# Altium PCB M8030.PcbDoc
Units mm, origin at the board's own origin, x right, y up, seen from the top; angles counter-clockwise.
Board outline 35.05 x 35.05 mm, 4 copper layers (Top Layer, GND, Signal, Bottom Layer), stack 0.778 mm thick; 49 components, 40 nets, 167 pads, 262 vias.
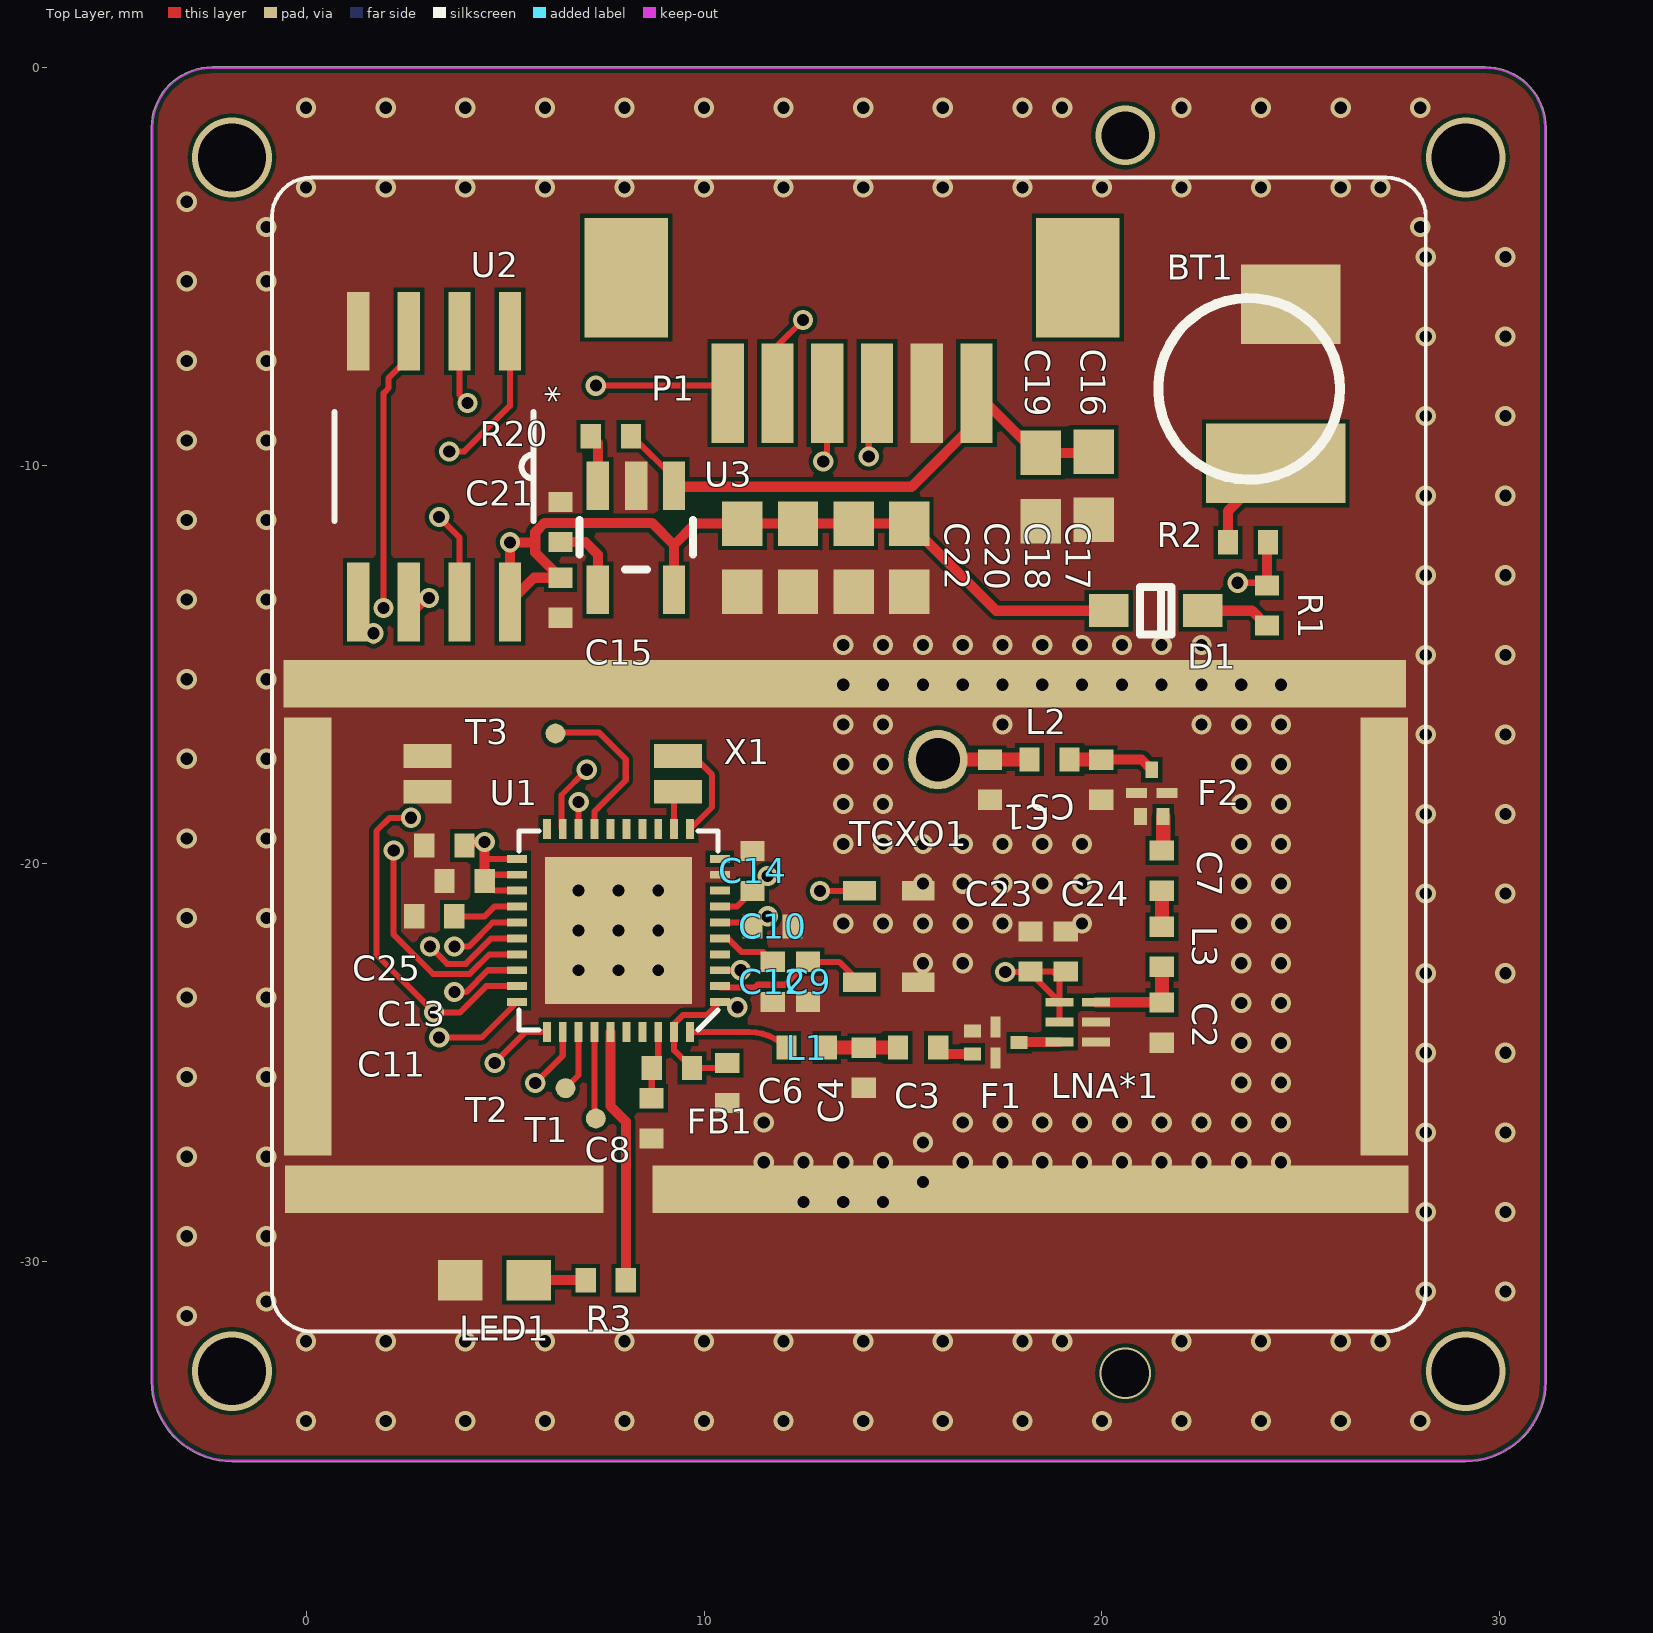
[diagram p0: Top Layer view]
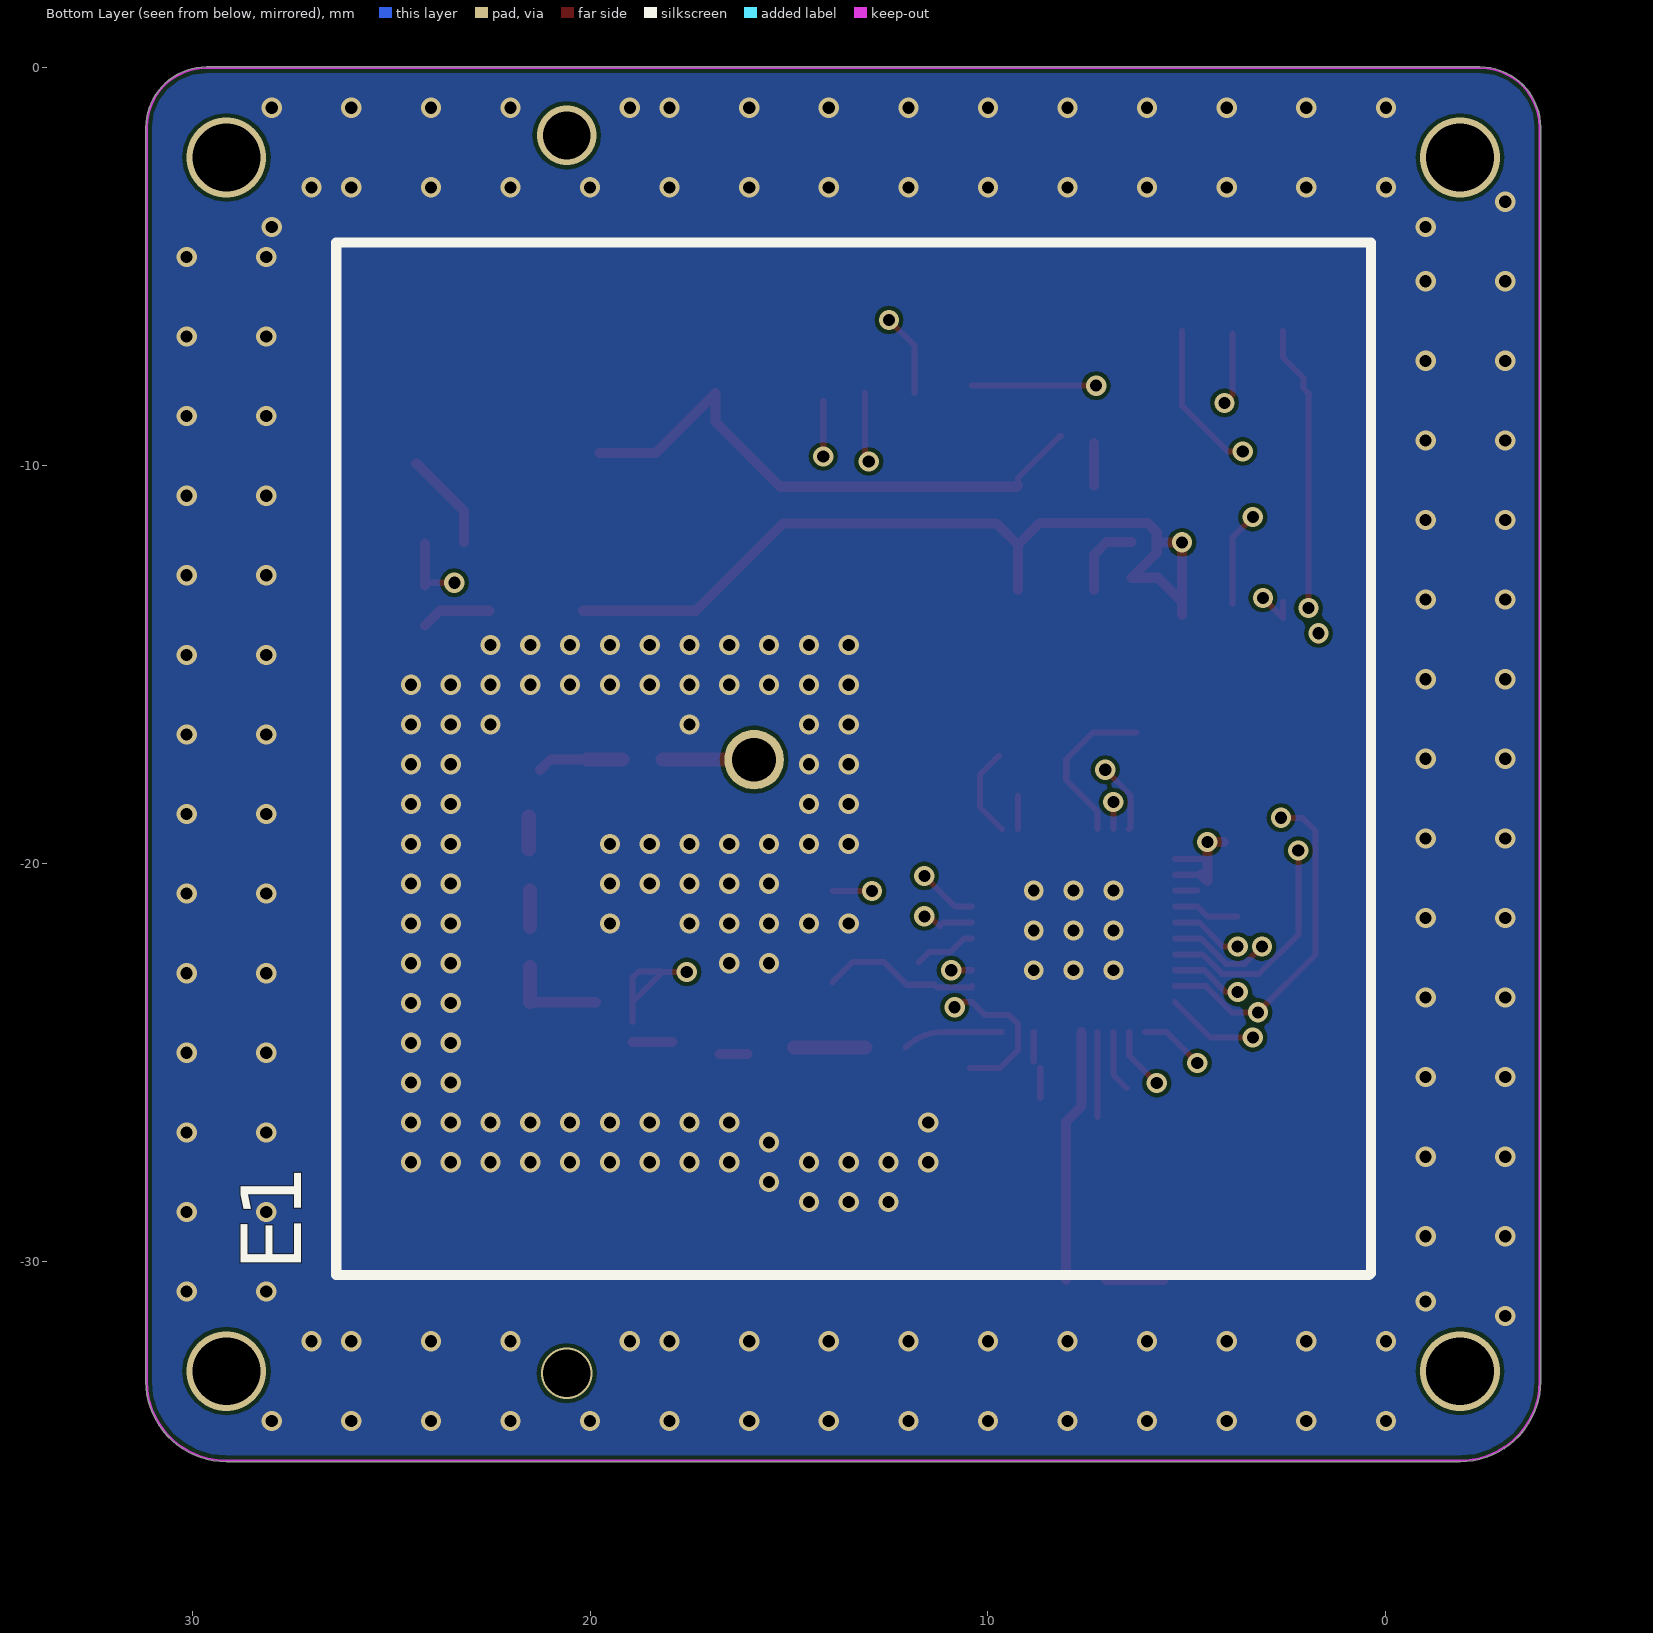
[diagram p1: Bottom Layer view, seen from below]
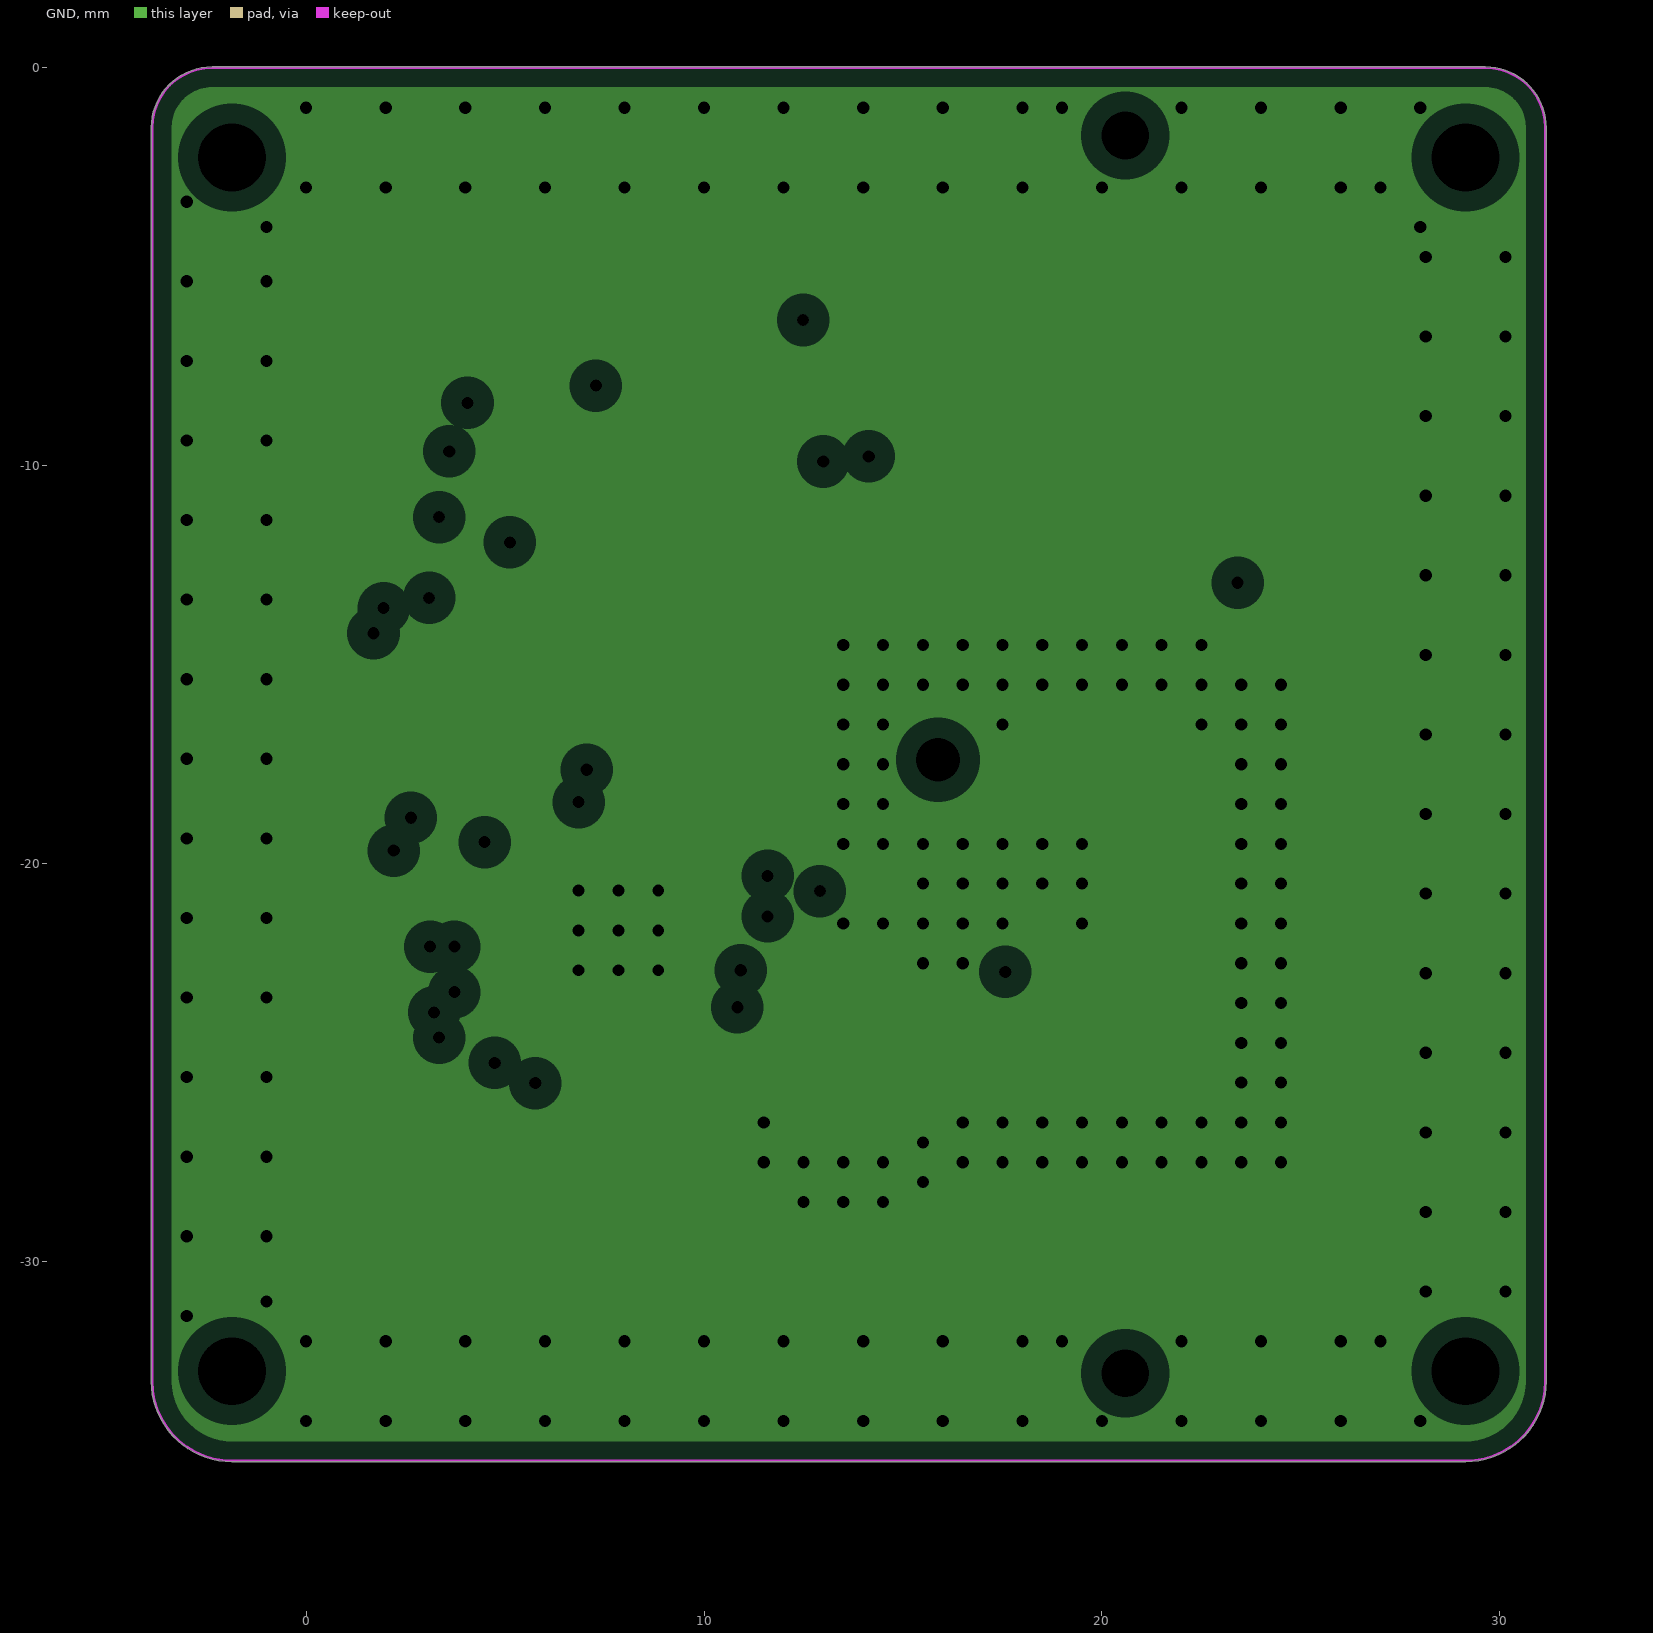
[diagram p2: GND, clearances drawn from the general rule]
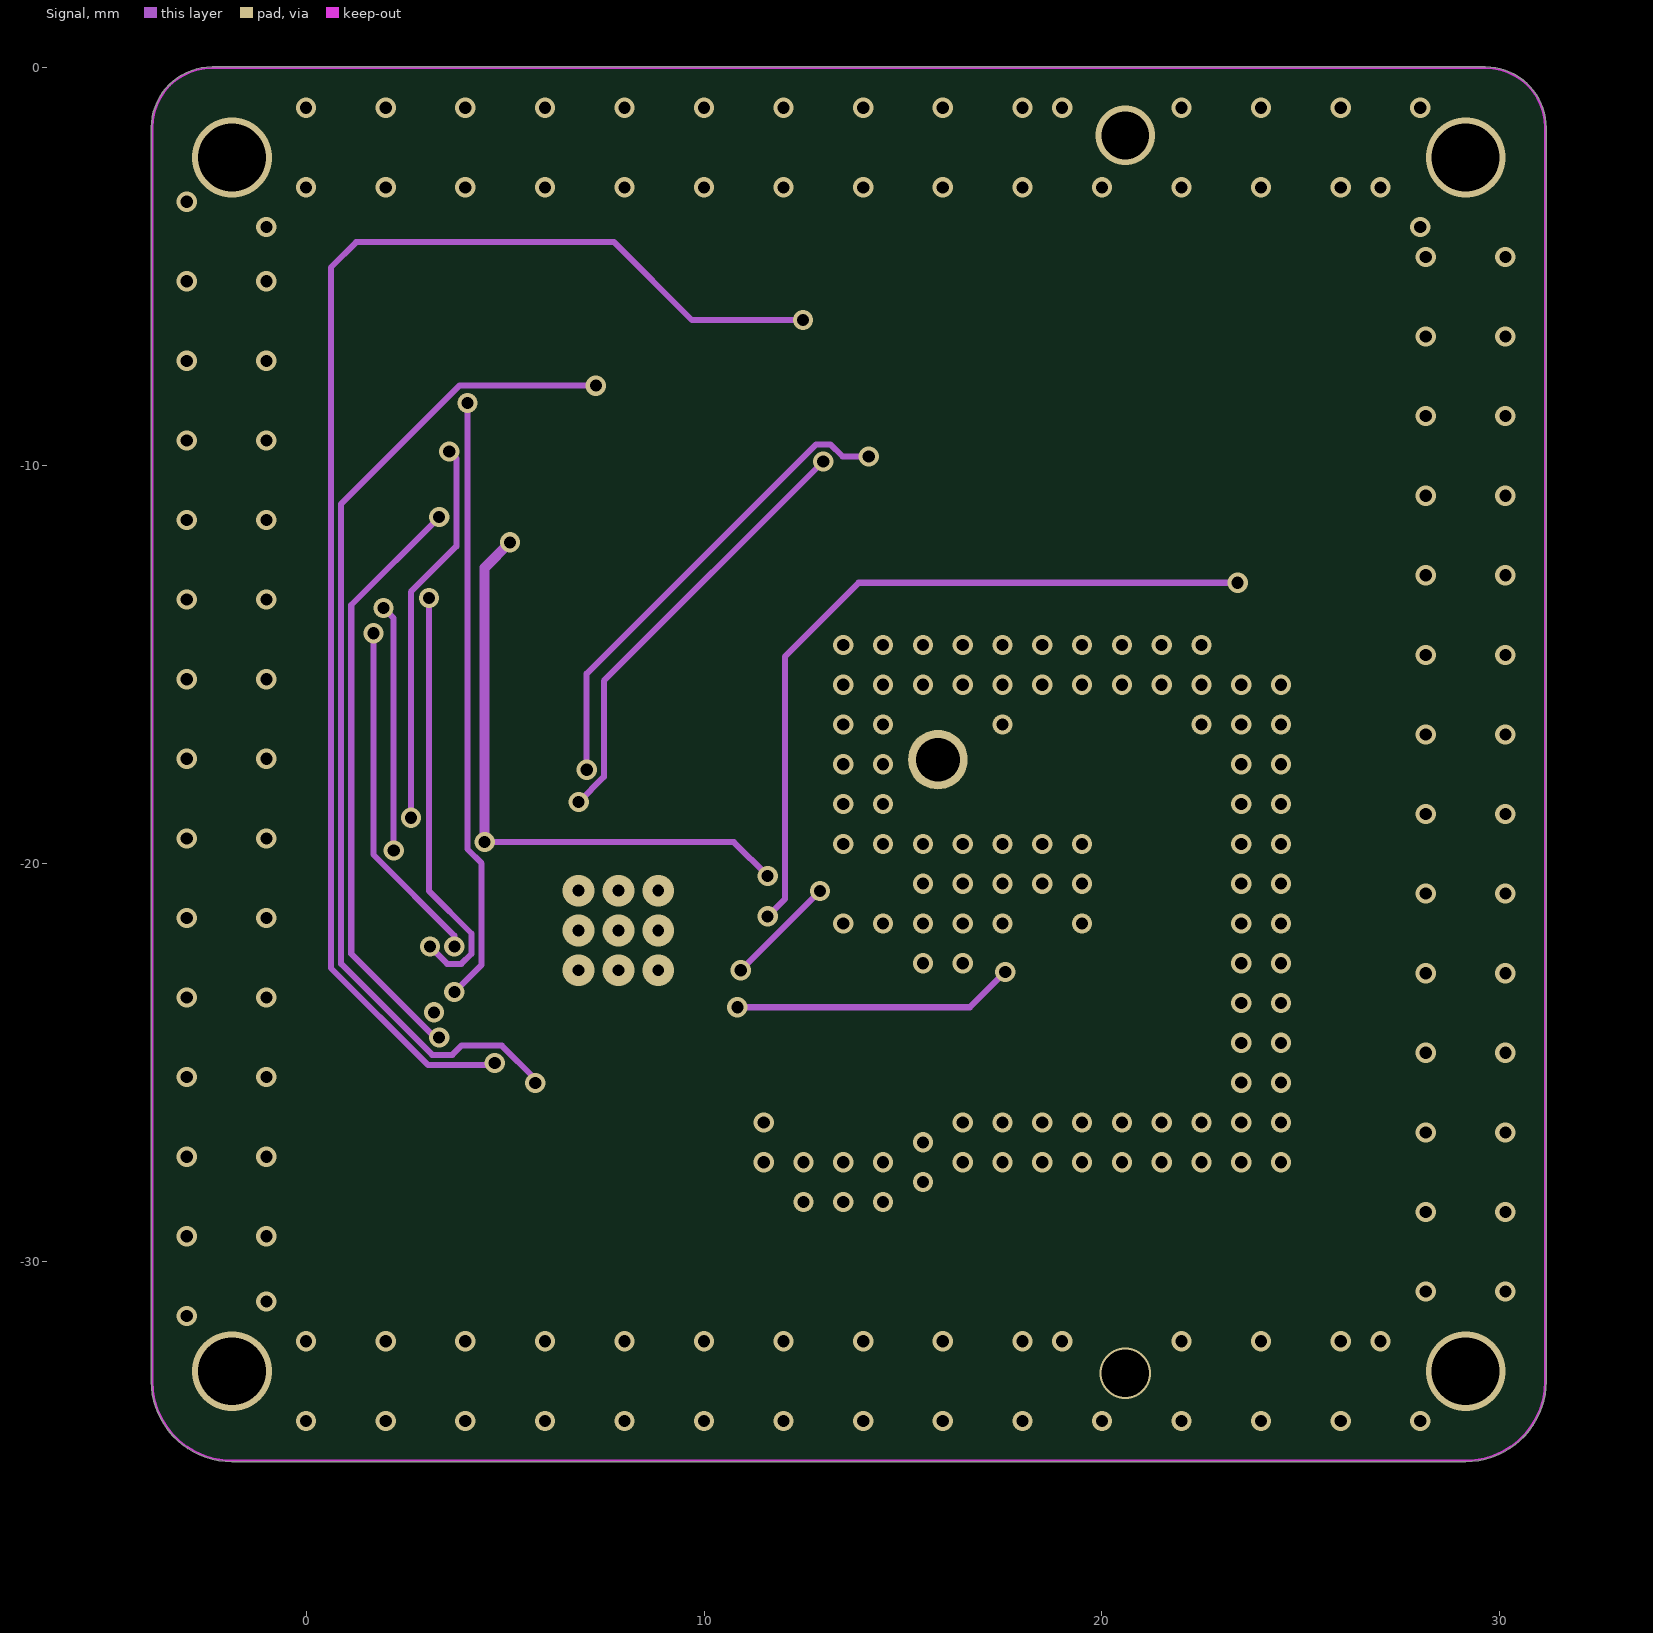
[diagram p3: Signal]

## Layer stack, top to bottom
Top Solder: solder mask 0.0102, Solder Resist, Dk 3.5
Top Layer: signal copper 0.0356
Dielectric 1: core 0.254, FR-4, Dk 4.2
GND: plane copper 0.036, net GND
Dielectric 3: prepreg 0.127, Dk 4.2
Signal: signal copper 0.036
Dielectric 2: core 0.254, Dk 4.2
Bottom Layer: signal copper 0.0356
Bottom Solder: solder mask 0.0102, Solder Resist, Dk 3.5

## Board outline
-3.888,-33 -3.888,-1.5 cw(c-3.863,-1.5) -3.888,-1.5 cw(c-2.363,-1.5) -2.363,0.025 29.637,0.025 cw(c29.637,-1.5) 31.162,-1.5 cw(c31.137,-1.5) 31.162,-1.5 31.162,-33 cw(c29.137,-33) 29.137,-35.025 -1.863,-35.025 cw(c-1.863,-33)

## Design rules (kind name [scope] priority, off if disabled: settings)
Clearance [All] p1: gap=0.102
MinimumSolderMaskSliver [All] p1 off: minsoldermaskwidth=0.254
PlaneClearance [All] p1: clearance=0.508
PlaneConnect [All] p1: planeconnectstyle=Direct reliefexpansion=0.508 reliefentries=4 reliefconductorwidth=0.254 reliefairgap=0.254
PolygonConnect [All] p1: connectstyle=Direct reliefconductorwidth=0.254 reliefentries=4 polygonreliefangle="90 Angle" airgapwidth=0.254
RoomDefinition M8030 [InComponentClass('M8030')] p1 off: confinementstyle=ConfineIn formatcopy=TRUE lockcomponents=FALSE outline 131.331,-44.746 137.427,-44.746 137.427,-36.11 131.331,-36.11
RoutingVias [All] p1: holewidth=0.305 width=0.508 viastyle="Through Hole" minholewidth=0.305 minwidth=0.508 maxholewidth=0.711 maxwidth=1.27
SilkToSilkClearance [All] p1 off: silktosilkclearance=0.254
SilkToSolderMaskClearance [IsPad] p1 off: minsilkscreentomaskgap=0.254 clearancetoexposedcopper=TRUE
SolderMaskExpansion [All] p1: expansion=0.102
UnpouredPolygon [All] p1: allowunpoured=FALSE
Width [All] p1: maxlimit=0.508 minlimit=0.102 preferedwidth=0.152
24 further rules are at their usual default settings.

## Components (designator, comment, footprint, x,y, rotation, side; value= is the part's Value field where it differs from the comment)
BT1 "Battery" XH414H-IV01E 23.697,-8.065 r180 top
C1 "NC" 0402 17.187,-17.891 r90 top
C2 "NC" 0402 21.505,-23.987 r270 top
C3 "47pF" 0402 15.376,-24.618 r0 top
C4 "2.7pF" 0402 14.012,-25.13 r90 top
C5 "NC" 0402 19.981,-17.891 r90 top
C6 "1uF" 0402 10.583,-25.511 r90 top
C7 "470pF" 0402 21.505,-20.177 r90 top
C8 "1uF" 0402 8.678,-26.4 r90 top
C9 "1uF" 0402 12.615,-22.971 r90 top
C10 "1uF" 0402 11.726,-21.574 r180 top
C11 "1uF" 0402 3.217,-21.32 r0 top
C12 "2.2uF" 0402 11.726,-22.971 r90 top
C13 "4.7uF" 0402 3.979,-20.431 r0 top
C14 "1uF" 0402 11.218,-20.177 r270 top
C15 "1uF" 0402 6.392,-13.319 r90 top
C16 "4.7uF" 0603 19.796,-10.496 r270 top
C17 "4.7uF" 0603 15.155,-12.303 r270 top
C18 "4.7uF" 0603 13.758,-12.303 r270 top
C19 "0.1uF" 0603 18.457,-10.525 r270 top
C20 "4.7uF" 0603 12.361,-12.303 r270 top
C21 "0.1uf" 0402 6.392,-11.414 r90 top
C22 "0.1uF" 0603 10.964,-12.303 r270 top
C23 "33nF" 0402 18.203,-22.209 r90 top
C24 "47pF" 0402 19.092,-22.209 r90 top
C25 "4.7uF" 0402 3.471,-19.542 r0 top
D1 "Diode" LC-SOD-323 21.353,-13.64 r180 top
E1 "Antenna" "passive25x25 - 3D" 13.377,-17.383 r90 bottom
F1 "SAW-SAFEB" SAFEB1G57KE0 17.916,-24.491 r0 top
F2 "SAW-SAFEB" SAFEB1G57KE0 21.251,-17.637 r90 top
FB1 "BLM15HD102SN1" 0402 9.186,-25.13 r0 top
L1 "6.8nH" 0402 12.582,-24.618 r180 top
L2 "0R" 0402 18.678,-17.379 r0 top
L3 "6.8nH" 0402 21.505,-22.082 r270 top
LED1 "LED0" 0603 4.741,-30.464 r180 top
LNA*1 "MAX2659" MAX2659 19.854,-23.479 r180 top
P1 "Usart Interface" WFRSM125 13.094,-8.17 r180 top
R1 "" 0402 24.147,-13.513 r90 top
R2 "" 0402 23.664,-11.922 r0 top
R3 "" 0402 7.535,-30.464 r180 top
R20 "10k" 0402 7.662,-9.255 r180 top
T1 "TestPad" "TestPad - 0.5mm" 7.281,-26.4 r270 top
T2 "TestPad" "TestPad - 0.5mm" 6.519,-25.638 r0 top
T3 "TestPad" "TestPad - 0.5mm" 6.265,-16.726 r0 top
TCXO1 "26M 0.5ppm" 2520_TCXO 14.647,-21.828 r90 top
U1 "UBX-M8030-KT_1" UBX-M8030-KT 7.849,-21.676 r180 top
U2 "SQI_FLash" SO8-208mil 3.217,-10.017 r270 top
U3 "RT9193-33GB" SOT23-5 8.297,-11.795 r180 top
X1 "32.768k, 6-12pF" MC-146 6.198,-17.739 r180 top

## Footprints (in the part's own frame and the unit in brackets; to place one, negate y for a bottom-side part, rotate by r counter-clockwise, add the part's x,y. Pads: shape width x height; smd on the part's side, far side on the other; paste and mask are expansions set on the pad)
0402 [mil] "0402-RES"
  rect 20x24 smd: 1(-19.69,0) 2(20,0)
0603 [mil] "0603-RES"
  rect 44x40 smd: 1(-33.46,0) 2(34,0)
2520_TCXO [mm]
  rect 0.5x0.825 smd: 1(-1.15,-0.737) 2(1.15,-0.737) 3(1.15,0.737) 4(-1.15,0.737)
LC-SOD-323 [mm]
  rect 1x0.83 smd: 1(1.18,0) 2(-1.18,0)
  silkscreen extent -0.4,-0.6 0.4,0.6, body extent -1.35,-0.62 1.35,0.63, height 1.1
MAX2659 [mm]
  rect 0.7x0.22 smd: 1(0,1) 2(0,0.5) 3(0,0) 4(0.92,0) 5(0.92,0.5) 6(0.92,1)
  body extent -0.03,-0.23 0.97,1.22, height 0.72
MC-146 [mm]
  rect 1.2x0.6 smd: 1(-3.15,0.45) 2(3.15,0.45) 3(-3.15,-0.45) 4(3.15,-0.45)
"passive25x25 - 3D" [mm]
  round 1.5 hole 1.1: 1(0,2.5)
  silkscreen extent -12.95,-13 13,13, body extent -12.42,-12.55 12.68,12.55, height 2.5
SAFEB1G57KE0 [mm]
  rect 0.425x0.325 smd: 1(0,0) 3(-1.175,-0.288) 4(-1.175,0.288)
  rect 0.25x0.525 smd: 2(-0.587,-0.387) 5(-0.587,0.387)
  body extent -1.27,-0.56 0.08,0.53, height 0.6
SO8-208mil [mil]
  rect 78x22 smd: 1(-133.86,75) 2(-133.86,25) 3(-133.86,-25) 4(-133.86,-75) 5(133.86,-75) 6(133.86,-25) 7(133.86,25) 8(133.86,75)
  silkscreen extent -54,-99 54,99, body extent -118,-96 118,96, height 64
SOT23-5 [mil] "SOT23-5"
  rect 22x48 smd: 1(-37.4,-51.19) 2(0,-51.19) 3(38,-51.19) 4(38,52) 5(-37.4,52)
  silkscreen extent -56,-17 56,32
"TestPad - 0.5mm" [mm]
  round 0.5 smd: 1(0,0)
UBX-M8030-KT [mm]
  rect 3.7x3.7 smd: 0(0,0)
  rect 0.5x0.2 smd: 1(-2.55,1.8) 2(-2.55,1.4) 3(-2.55,1) 4(-2.55,0.6) 5(-2.55,0.2) 6(-2.55,-0.2) 7(-2.55,-0.6) 8(-2.55,-1) 9(-2.55,-1.4) 10(-2.55,-1.8) 21(2.55,-1.8) 22(2.55,-1.4) 23(2.55,-1) 24(2.55,-0.6) 25(2.55,-0.2) 26(2.55,0.2) 27(2.55,0.6) 28(2.55,1) 29(2.55,1.4) 30(2.55,1.8)
  rect 0.2x0.5 smd: 11(-1.8,-2.55) 12(-1.4,-2.55) 13(-1,-2.55) 14(-0.6,-2.55) 15(-0.2,-2.55) 16(0.2,-2.55) 17(0.6,-2.55) 18(1,-2.55) 19(1.4,-2.55) 20(1.8,-2.55) 31(1.8,2.55) 32(1.4,2.55) 33(1,2.55) 34(0.6,2.55) 35(0.2,2.55) 36(-0.2,2.55) 37(-0.6,2.55) 38(-1,2.55) 39(-1.4,2.55) 40(-1.8,2.55)
  silkscreen extent -2.5,-2.5 2.5,2.5, body extent -2.5,-2.5 2.5,2.5, height 1
WFRSM125 [mm]
  rect 0.81x2.5 smd: 1(-3.75,0) 2(-2.5,0) 3(-1.25,0) 4(0,0) 5(1.25,0) 6(2.5,0)
  rect 2.1x3 smd: shell(-6.3,-2.9) shell(5.05,-2.9)
  body extent -6.79,-3.82 5.46,0.38, height 3.4
XH414H-IV01E [mm]
  rect 3.5x2 smd: 1(-0.671,1.873)
  rect 2.5x2 smd: 2(-1.052,-2.127)
  silkscreen extent -2.28,-2.28 2.28,2.28, body extent -2.42,-2.4 2.36,2.4, height 2

## Part data
BT1: "Multicell Battery"
C1 C2 C3 C4 C5 C6 C7 C8 C9 C10 C11 C12 C13 C14 C15 C23 C24 C25: library part Cap, "Capacitor"
C16 C17 C18 C19 C20 C21 C22: library part CAP0402-CAP, "电容"
D1: "Default Diode"
E1: "Generic Antenna"
FB1 R1 R2 R3: library part Res2, "Resistor"
L1 L2 L3: library part Inductor, "Inductor"
LED1: "Typical INFRARED GaAs LED"
P1: library part "Header 6", "Header, 6-Pin"
R20: library part RESISTOR0402-RES, "电阻"
TCXO1: library part 7L26002009(2520TCXO)
U3: library part V_REG_LDOSMD, "<b>Voltage Regulator LDO</b> / Standard 150mA LDO voltage regulator in SOT-23 layout. Micrel part MIC5205. BP (by-pass) pin is used to lower output noise with 470pF cap."
X1: library part OSCILLATOR-3.2X2.5, "Crystal Oscillator in 3.2x2.5 SMD"

## Free pads (board coordinates)
  rect 19x1.2 smd: 0(18.203,-28.178)
  rect 28.2x1.2 smd: 1(13.537,-15.475)
  rect 1.2x11 smd: 2(27.093,-21.828) 3(0.042,-21.828)
  rect 8x1.2 smd: 4(3.471,-28.178)

## Via types
v1: diameter 0.508, hole 0.305, Top Layer to Bottom Layer, tented both sides, 247 vias
v2: diameter 0.5/0.8/0.5 (per signal layer), hole 0.3, Top Layer to Bottom Layer, tented both sides, 9 vias
v3: diameter 2, hole 1.7, Top Layer to Bottom Layer, 4 vias
v4: diameter 1.3, hole 1.2, Top Layer to Bottom Layer, 1 vias
v5: diameter 1.5, hole 1.2, Top Layer to Bottom Layer, 1 vias

## Nets (pads, with @x,y where several pads share a name; then routed paths per layer and width w, separated by ;. In a path a pad name is that pad's centre, name@x,y a point inside that pad or via, vN(x,y) a via of type N, cw(c..) or ccw(c..) an arc to the next point about the centre after c; other vN are vias at no path point)
5V: C16.1 C19.1 P1.1 R20.1 U3.1 | length 14.3
  Top Layer w0.152: R20.1 8.198,-9.255 9.247,-10.304 U3.1
  Top Layer w0.254: U3.1 9.277,-10.525 15.217,-10.525 16.844,-8.898 P1.1 18.349,-9.675 C19.1 C16.1@19.767,-9.675
GND: BT1.2 C1.1 C2.2 C4.1 C5.1 C6.1 C8.1 C9.1 C10.1 C11.1 C12.1 C13.1 C14.1 C15.1 C16.2 C17.2 C18.2 C19.2 C20.2 C21.2 C22.2 C23.2 C24.2 C25.1 F1.2 F1.4 F1.5 F2.2 F2.4 F2.5 LED1.2 LNA*1.1 LNA*1.2 P1.2 pad.0 pad.1 pad.2 pad.3 pad.4 TCXO1.1 TCXO1.2 U1.0 U1.9 U2.4 U3.2 X1.2 X1.4
  other v1: 0,-34 2,-34 4,-34 6,-34 8,-34 10,-34 12,-34 14,-34 16,-34 18,-34 20,-34 22,-34 24,-34 26,-34 28,-34 0,-32 2,-32 4,-32 6,-32 8,-32 10,-32 12,-32 14,-32 16,-32 18,-32 19,-32 22,-32 24,-32 26,-32 27,-32 -3,-31.361 -1,-31 28.137,-30.75 30.137,-30.75 -3,-29.361 -1,-29.361 28.137,-28.75 30.137,-28.75 12.5,-28.5 13.5,-28.5 14.5,-28.5 15.5,-28 11.5,-27.5 12.5,-27.5 13.5,-27.5 14.5,-27.5 16.5,-27.5 17.5,-27.5 18.5,-27.5 19.5,-27.5 20.5,-27.5 21.5,-27.5 22.5,-27.5 23.5,-27.5 24.5,-27.5 -3,-27.361 -1,-27.361 15.5,-27 28.137,-26.75 30.137,-26.75 11.5,-26.5 16.5,-26.5 17.5,-26.5 18.5,-26.5 19.5,-26.5 20.5,-26.5 21.5,-26.5 22.5,-26.5 23.5,-26.5 24.5,-26.5 23.5,-25.5 24.5,-25.5 -3,-25.361 -1,-25.361 28.137,-24.75 30.137,-24.75 23.5,-24.5 24.5,-24.5 23.5,-23.5 24.5,-23.5 -3,-23.361 -1,-23.361 28.137,-22.75 30.137,-22.75 15.5,-22.5 16.5,-22.5 23.5,-22.5 24.5,-22.5 13.5,-21.5 14.5,-21.5 15.5,-21.5 16.5,-21.5 17.5,-21.5 19.5,-21.5 23.5,-21.5 24.5,-21.5 -3,-21.361 -1,-21.361 28.137,-20.75 30.137,-20.75 15.5,-20.5 16.5,-20.5 17.5,-20.5 18.5,-20.5 19.5,-20.5 23.5,-20.5 24.5,-20.5 13.5,-19.5 14.5,-19.5 15.5,-19.5 16.5,-19.5 17.5,-19.5 18.5,-19.5 19.5,-19.5 23.5,-19.5 24.5,-19.5 -3,-19.361 -1,-19.361 28.137,-18.75 30.137,-18.75 13.5,-18.5 14.5,-18.5 23.5,-18.5 24.5,-18.5 13.5,-17.5 14.5,-17.5 23.5,-17.5 24.5,-17.5 -3,-17.361 -1,-17.361 28.137,-16.75 30.137,-16.75 13.5,-16.5 14.5,-16.5 17.5,-16.5 22.5,-16.5 23.5,-16.5 24.5,-16.5 13.5,-15.5 14.5,-15.5 15.5,-15.5 16.5,-15.5 17.5,-15.5 18.5,-15.5 19.5,-15.5 20.5,-15.5 21.5,-15.5 22.5,-15.5 23.5,-15.5 24.5,-15.5 -3,-15.361 -1,-15.361 28.137,-14.75 30.137,-14.75 13.5,-14.5 14.5,-14.5 15.5,-14.5 16.5,-14.5 17.5,-14.5 18.5,-14.5 19.5,-14.5 20.5,-14.5 21.5,-14.5 22.5,-14.5 -3,-13.361 -1,-13.361 28.137,-12.75 30.137,-12.75 -3,-11.361 -1,-11.361 28.137,-10.75 30.137,-10.75 -3,-9.361 -1,-9.361 28.137,-8.75 30.137,-8.75 -3,-7.361 -1,-7.361 28.137,-6.75 30.137,-6.75 -3,-5.361 -1,-5.361 28.137,-4.75 30.137,-4.75 -1,-4 28,-4 -3,-3.361 0,-3 2,-3 4,-3 6,-3 8,-3 10,-3 12,-3 14,-3 16,-3 18,-3 20,-3 22,-3 24,-3 26,-3 27,-3 0,-1 2,-1 4,-1 6,-1 8,-1 10,-1 12,-1 14,-1 16,-1 18,-1 19,-1 22,-1 24,-1 26,-1 28,-1
  other v2: 6.849,-22.676 7.849,-22.676 8.849,-22.676 6.849,-21.676 7.849,-21.676 8.849,-21.676 6.849,-20.676 7.849,-20.676 8.849,-20.676
LED: R3.1 U1.35 | length 6.4
  Top Layer w0.254: U1.35 7.649,-26.091 8.035,-26.477 R3.1
NetBT1_1: BT1.1 R2.1 | length 2.5
  Top Layer w0.254: R2.1 23.164,-11.142 BT1.1
NetC1_2: C1.2 E1.1 L2.1 | length 2.3
  Top Layer w0.356: E1.1@15.881,-17.379 17.281,-17.379 L2.1
NetC2_1: C2.1 L3.2 LNA*1.3 | length 2.5
  Top Layer w0.254: LNA*1.3 21.497,-23.479 C2.1
  Top Layer w0.356: C2.1@21.505,-23.471 L3.2
NetC3_1: C3.1 C4.2 L1.1 | length 1.8
  Top Layer w0.356: L1.1 C3.1
NetC3_2: C3.2 F1.3 | length 0.7
  Top Layer w0.254: C3.2@16.045,-24.779 F1.3
NetC5_2: C5.2 F2.1 L2.2 | length 2.2
  Top Layer w0.254: C5.2@20.075,-17.379 20.993,-17.379 F2.1
  Top Layer w0.356: L2.2 C5.2@20.075,-17.379
NetC7_1: C7.1 L3.1 | length 0.9
  Top Layer w0.356: L3.1 C7.1
NetC7_2: C7.2 F2.3 | length 0.8
  Top Layer w0.356: C7.2@21.539,-19.636 F2.3
NetC8_2: C8.2 FB1.1 U1.38 | length 1.5
  Top Layer w0.152: C8.2@8.686,-25.884 FB1.1 ; FB1.1@8.849,-24.967 U1.38
NetC9_2: C9.2 TCXO1.4 U1.2 | length 4
  Top Layer w0.152: U1.2 10.399,-23.107 11.279,-23.107 11.348,-23.039 12.039,-23.039 C9.2 13.395,-22.463 TCXO1.4
NetC10_2: C10.2 R1.2 R2.2 U1.6 | length 22.1
  Top Layer w0.152: U1.6 11.12,-21.476 C10.2 11.551,-21.241 11.599,-21.288 v1(11.599,-21.32) ; v1(23.41,-12.938) 24.08,-12.938 R1.2
  Top Layer w0.254: R1.2 R2.2@24.147,-11.947
  Signal w0.152: v1(11.599,-21.32) 12.031,-20.888 12.031,-14.792 13.885,-12.938 v1(23.41,-12.938)
NetC11_2: C11.2 U1.24 | length 1.7
  Top Layer w0.152: C11.2 4.487,-21.32 4.731,-21.076 U1.24
NetC12_2: C12.2 U1.5 | length 1.6
  Top Layer w0.152: U1.5 10.601,-21.876 10.947,-22.222 11.485,-22.222 C12.2
NetC21_1: C21.1 U3.4 | length 2
  Top Layer w0.254: C21.1 7.019,-11.914 7.332,-12.227 U3.4
NetD1_2: D1.2 R1.1 | length 1.8
  Top Layer w0.254: D1.2 23.774,-13.64 R1.1
NetF1_1: F1.1 LNA*1.6 | length 1
  Top Layer w0.254: F1.1@17.929,-24.479 LNA*1.6
NetL1_2: L1.2 U1.40 | length 2.5
  Top Layer w0.152: U1.40 11.126,-24.226 cw(c11.126,-25.567) L1.2
NetLED1_1: LED1.1 R3.2 | length 1.4
  Top Layer w0.254: LED1.1 R3.2
NetP1_3: P1.3 U1.19 | length 15.2
  Top Layer w0.152: U1.19 6.417,-19.094 6.417,-18.271 v1(7.051,-17.637) ; v1(14.139,-9.763) P1.3@14.139,-8.375
  Signal w0.152: v1(7.051,-17.637) 7.051,-15.224 12.817,-9.458 13.175,-9.458 13.48,-9.763 v1(14.139,-9.763)
NetP1_4: P1.4 U1.18 | length 13.7
  Top Layer w0.152: U1.18 v1(6.849,-18.45) ; v1(12.996,-9.89) 13.094,-9.988 P1.4
  Signal w0.152: v1(6.849,-18.45) 7.483,-17.816 7.483,-15.403 v1(12.996,-9.89)
NetP1_5: P1.5 U1.31 | length 39.4
  Top Layer w0.152: v1(4.741,-25.003) 5.518,-24.226 U1.31 ; P1.5 11.844,-6.978 v1(12.488,-6.334)
  Signal w0.152: v1(4.741,-25.003) 4.69,-25.054 3.06,-25.054 0.626,-22.62 0.626,-5.012 1.26,-4.378 7.738,-4.378 9.694,-6.334 v1(12.488,-6.334)
NetP1_6: P1.6 U1.32 | length 30.3
  Top Layer w0.152: v1(5.757,-25.511) 6.449,-24.819 U1.32 ; v1(7.281,-7.985) P1.6@10.409,-7.985
  Signal w0.152: v1(5.757,-25.511) 5.757,-25.408 4.92,-24.571 3.903,-24.571 3.674,-24.8 3.165,-24.8 0.88,-22.515 0.88,-10.957 3.852,-7.985 v1(7.281,-7.985)
NetR20_2: R20.2 U3.3 | length 1.1
  Top Layer w0.254: U3.3 R20.2@7.332,-9.433
NetT1_1: T1.1 U1.34 | length 2.1
  Top Layer w0.152: T1.1@7.249,-26.368 U1.34
NetT2_1: T2.1 U1.33 | length 1.5
  Top Layer w0.152: T2.1 6.849,-25.308 U1.33
NetT3_1: T3.1 U1.17 | length 4.1
  Top Layer w0.152: T3.1@6.265,-16.698 7.358,-16.698 8.033,-17.373 8.033,-17.901 7.249,-18.685 U1.17
NetTCXO1_3: TCXO1.3 U1.3 | length 4.3
  Top Layer w0.152: U1.3 v1(10.923,-22.676) ; v1(12.913,-20.685) TCXO1.3@13.903,-20.685
  Signal w0.152: v1(10.923,-22.676) v1(12.913,-20.685)
NetU1_11: U1.11 X1.3 | length 2.3
  Top Layer w0.152: U1.11 10.202,-18.573 10.202,-17.764 X1.3@9.727,-17.289
NetU1_12: U1.12 X1.1 | length 0.8
  Top Layer w0.152: U1.12 X1.1@9.249,-18.288
SQI_CLK: U1.26 U2.6 | length 14.5
  Top Layer w0.152: U2.6 2.582,-13.827 v1(3.09,-13.319) ; v1(3.114,-22.082) 3.546,-22.514 4.012,-22.514 4.65,-21.876 U1.26
  Signal w0.152: v1(3.09,-13.319) 3.09,-20.685 4.157,-21.752 4.157,-22.261 3.904,-22.514 3.546,-22.514 v1(3.114,-22.082)
SQI_CS: U1.29 U2.1 | length 22.1
  Top Layer w0.152: v1(2.633,-18.844) 2.098,-18.844 1.769,-19.173 1.769,-22.285 v1(3.217,-23.733) 3.87,-23.733 4.527,-23.076 U1.29 ; v1(3.598,-9.636) 3.979,-9.636 5.122,-8.493 U2.1
  Signal w0.152: v1(2.633,-18.844) 2.633,-13.166 3.776,-12.023 3.776,-9.814 v1(3.598,-9.636)
SQI_D0: U1.25 U2.5 | length 10.7
  Top Layer w0.152: v1@1.693,-14.414 v1(1.693,-14.208) ; v1(3.725,-22.082) 4.084,-22.082 4.691,-21.476 U1.25
  Signal w0.152: v1(1.693,-14.208) 1.693,-19.772 3.725,-21.804 v1(3.725,-22.082)
SQI_D1: U1.28 U2.2 | length 19
  Top Layer w0.152: v1(3.725,-23.225) 4.019,-23.225 4.568,-22.676 U1.28 ; U2.2@3.852,-6.675 3.852,-8.214 v1(4.055,-8.417)
  Signal w0.152: v1@3.598,-23.098 v1(3.725,-23.225) 4.411,-22.539 4.411,-19.989 4.055,-19.633 v1(4.055,-8.417)
SQI_D2: U1.27 U2.3 | length 19.2
  Top Layer w0.152: v1(1.947,-13.573) 1.947,-8.17 2.074,-8.043 2.074,-7.789 2.582,-7.281 U2.3 ; v1(2.201,-19.669) 2.201,-21.779 3.19,-22.768 4.117,-22.768 4.609,-22.276 U1.27
  Signal w0.152: v1(1.947,-13.573) 2.201,-13.827 v1(2.201,-19.669)
SQI_D3: U1.30 U2.7 | length 19.7
  Top Layer w0.152: v1(3.344,-24.368) 4.407,-24.368 U1.30 ; v1(3.344,-11.287) 3.852,-11.795 U2.7@3.852,-13.475
  Signal w0.152: v1(3.344,-24.368) 3.241,-24.368 1.134,-22.261 1.134,-13.497 v1(3.344,-11.287)
VCC: C13.2 C14.2 C15.2 C17.1 C18.1 C20.1 C22.1 C25.2 D1.1 U1.7 U1.21 U1.22 U1.23 U2.8 U3.5 | length 42.8
  Top Layer w0.152: 4.534,-19.876 U1.21 ; C13.2@4.642,-20.276 U1.22 ; C13.2@4.732,-20.676 U1.23 ; U1.7 10.827,-21.076 C14.2 v1(11.599,-20.304)
  Top Layer w0.254: C25.2@4.067,-19.454 v1(4.487,-19.454) C13.2 C13.2@4.642,-20.276 ; U2.8@5.122,-13.74 U2.8 ; 5.756,-11.922 v1(5.122,-11.922) U2.8 ; U3.5 9.247,-11.988 ; D1.1 17.342,-13.64 C17.1 C18.1 C20.1 C22.1 9.782,-11.453 9.247,-11.988 ; U2.8 5.728,-12.811 C15.2 5.757,-12.176 5.757,-11.667 5.993,-11.431 8.69,-11.431 9.247,-11.988
  Signal w0.152: v1(4.487,-19.454) 10.749,-19.454 v1(11.599,-20.304)
  Signal w0.254: v1(4.487,-19.454) 4.487,-12.557 v1(5.122,-11.922)
VCC_RF: C6.2 C23.1 C24.1 FB1.2 LNA*1.4 LNA*1.5 U1.1 U1.39 | length 14.7
  Top Layer w0.152: C6.2@10.456,-25.13 FB1.2 9.249,-24.685 U1.39 9.249,-24.024 9.476,-23.798 10.077,-23.798 U1.1 10.834,-23.476 10.837,-23.479 v1(10.837,-23.606) ; v1(17.568,-22.717) 18.172,-22.717 LNA*1.4 ; C23.1 18.776,-22.709 18.934,-22.867 LNA*1.4 ; LNA*1.5 LNA*1.4
  Signal w0.152: v1(10.837,-23.606) 16.679,-23.606 v1(17.568,-22.717)
pads on no net: P1.shell U1.4 U1.8 U1.10 U1.13 U1.14 U1.15 U1.16 U1.20 U1.36 U1.37
copper on no net:
  other v3: -1.863,-32.75 29.137,-32.75 -1.863,-2.25 29.137,-2.25
  other v4: 20.587,-32.805
  other v5: 20.587,-1.695

## Polygon pours and split planes (outlines as drawn)
GND on Top Layer "Top Layer-No Net" (solid, remove dead copper, pour order 4): -4.657,0.397 32.3,0.397 32.427,0.524 32.046,0.143 32.046,-36.306 -3.514,-36.306 -5.038,-34.782
GND on Bottom Layer "Top Layer-No Net" (solid, remove dead copper, pour order 4): 32,0.5 -5,0.5 -5,-37 -4,-36 31.5,-36
GND on GND (split plane): 30.653,-1.493 30.652,-1.5 30.653,-1.493
GND on GND (split plane): 29.77,-0.492 29.9,-0.518 30.026,-0.56 30.146,-0.619 30.256,-0.693 30.356,-0.781 30.444,-0.881 30.518,-0.991 30.577,-1.111 30.619,-1.237 30.645,-1.367 30.653,-1.487 30.653,-1.493 30.615,-1.493 30.612,-1.5 30.652,-1.5 30.652,-33 30.653,-33.015 30.645,-33.17 30.616,-33.338 30.569,-33.501 30.504,-33.658 30.422,-33.807 30.323,-33.946 30.21,-34.073 30.083,-34.186 29.944,-34.285 29.795,-34.367 29.638,-34.432 29.475,-34.479 29.307,-34.508 29.152,-34.516 29.137,-34.515 -1.863,-34.515 -1.878,-34.516 -2.033,-34.508 -2.201,-34.479 -2.364,-34.432 -2.521,-34.367 -2.67,-34.285 -2.809,-34.186 -2.936,-34.073 -3.049,-33.946 -3.148,-33.807 -3.23,-33.658 -3.295,-33.501 -3.342,-33.338 -3.371,-33.17 -3.379,-33.015 -3.378,-33 -3.378,-1.507 -3.341,-1.507 -3.338,-1.5 -3.378,-1.5 -3.379,-1.487 -3.371,-1.367 -3.345,-1.237 -3.303,-1.111 -3.244,-0.991 -3.17,-0.881 -3.082,-0.781 -2.982,-0.693 -2.871,-0.619 -2.752,-0.56 -2.626,-0.518 -2.496,-0.492 -2.376,-0.484 -2.363,-0.485 29.637,-0.485 29.65,-0.484

## Keep-outs
Keep-Out Layer:
  lines w0.05: -3.863,-33 ccw(c-1.863,-33) -1.863,-35 29.137,-35 ccw(c29.137,-33) 31.137,-33 31.137,-1.5 ccw(c29.637,-1.5) 29.637,0 -2.363,0 ccw(c-2.363,-1.5) -3.863,-1.5 -3.863,-33

## Silkscreen, mask and mechanical layers (free items; w line width, h text height)
Top Overlay:
  lines w0.1: -0.863,-30.75 ccw(c0.137,-30.75) 0.137,-31.75 27.137,-31.75 ccw(c27.137,-30.75) 28.137,-30.75 28.137,-3.75 ccw(c27.137,-3.75) 27.137,-2.75 0.137,-2.75 ccw(c0.137,-3.75) -0.863,-3.75 -0.863,-30.75
Bottom Solder:
  rectangle: 7.5,-5.5 10,-3
  rectangle: 12,-5.5 14.5,-3
  rectangle: 3.5,-31.5 6,-29
  rectangle: -0.5,-31.5 2,-29
  rectangle: 7.5,-31.5 10,-29
  rectangle: 13.5,-31.5 16,-29
  rectangle: 10.5,-29.5 13,-27
  rectangle: 16.5,-29.5 19,-27
  rectangle: 19.5,-31.5 22,-29
  rectangle: 23.5,-28.5 26,-26
  rectangle: -0.5,-27.5 2,-25
  rectangle: -0.5,-23.5 2,-21
  rectangle: 2.5,-28.5 5,-26
  rectangle: 7.5,-27.5 10,-25
  rectangle: 13.5,-26.5 16,-24
  rectangle: 19.5,-26.5 22,-24
  rectangle: 8.5,-22.5 11,-20
  rectangle: 4.5,-22.5 7,-20
  rectangle: 6.5,-23.5 9,-21
  rectangle: 6.5,-21.5 9,-19
  rectangle: 11.5,-22.5 14,-20
  rectangle: 16.5,-23.5 19,-21
  rectangle: 23.5,-23.5 26,-21
  rectangle: 23.5,-17.5 26,-15
  rectangle: 15.5,-15.5 18,-13
  rectangle: 19.5,-19.5 22,-17
  rectangle: 8.5,-17.5 11,-15
  rectangle: -0.5,-18.5 2,-16
  rectangle: -0.5,-12.5 2,-10
  rectangle: 3.5,-16.5 6,-14
  rectangle: 12.5,-9.5 15,-7
  rectangle: 6.5,-13.5 9,-11
  rectangle: 19.5,-14.5 22,-12
  rectangle: 23.5,-12.5 26,-10
  rectangle: 19.5,-6.5 22,-4
  rectangle: 15.5,-11.5 18,-9
  rectangle: 0.5,-8.5 3,-6
  rectangle: 4.5,-7.5 7,-5
  rectangle: 8.5,-9.5 11,-7
  rectangle: 11.5,-13.5 14,-11
  rectangle: 15.5,-7.5 18,-5
  rectangle: 19.5,-10.5 22,-8
  rectangle: 23.5,-7.5 26,-5
Mechanical 9:
  circle w0.025: c29.137,-35 r0.012

## Text inside footprints (layer, text, board x,y; h text height)
U2: Top Overlay "*" at 5.757,-7.985 h0.64 r270